# Altium PCB ecg-go_power.PcbDoc
Units mm, origin at the board's own origin, x right, y up, seen from the top; angles counter-clockwise.
Board outline 37 x 40 mm, 2 copper layers (Top Layer, Bottom Layer), stack 1.634 mm thick; 20 components, 14 nets, 74 pads, 37 vias.
Unrouted connection lines stored in the file: 1.
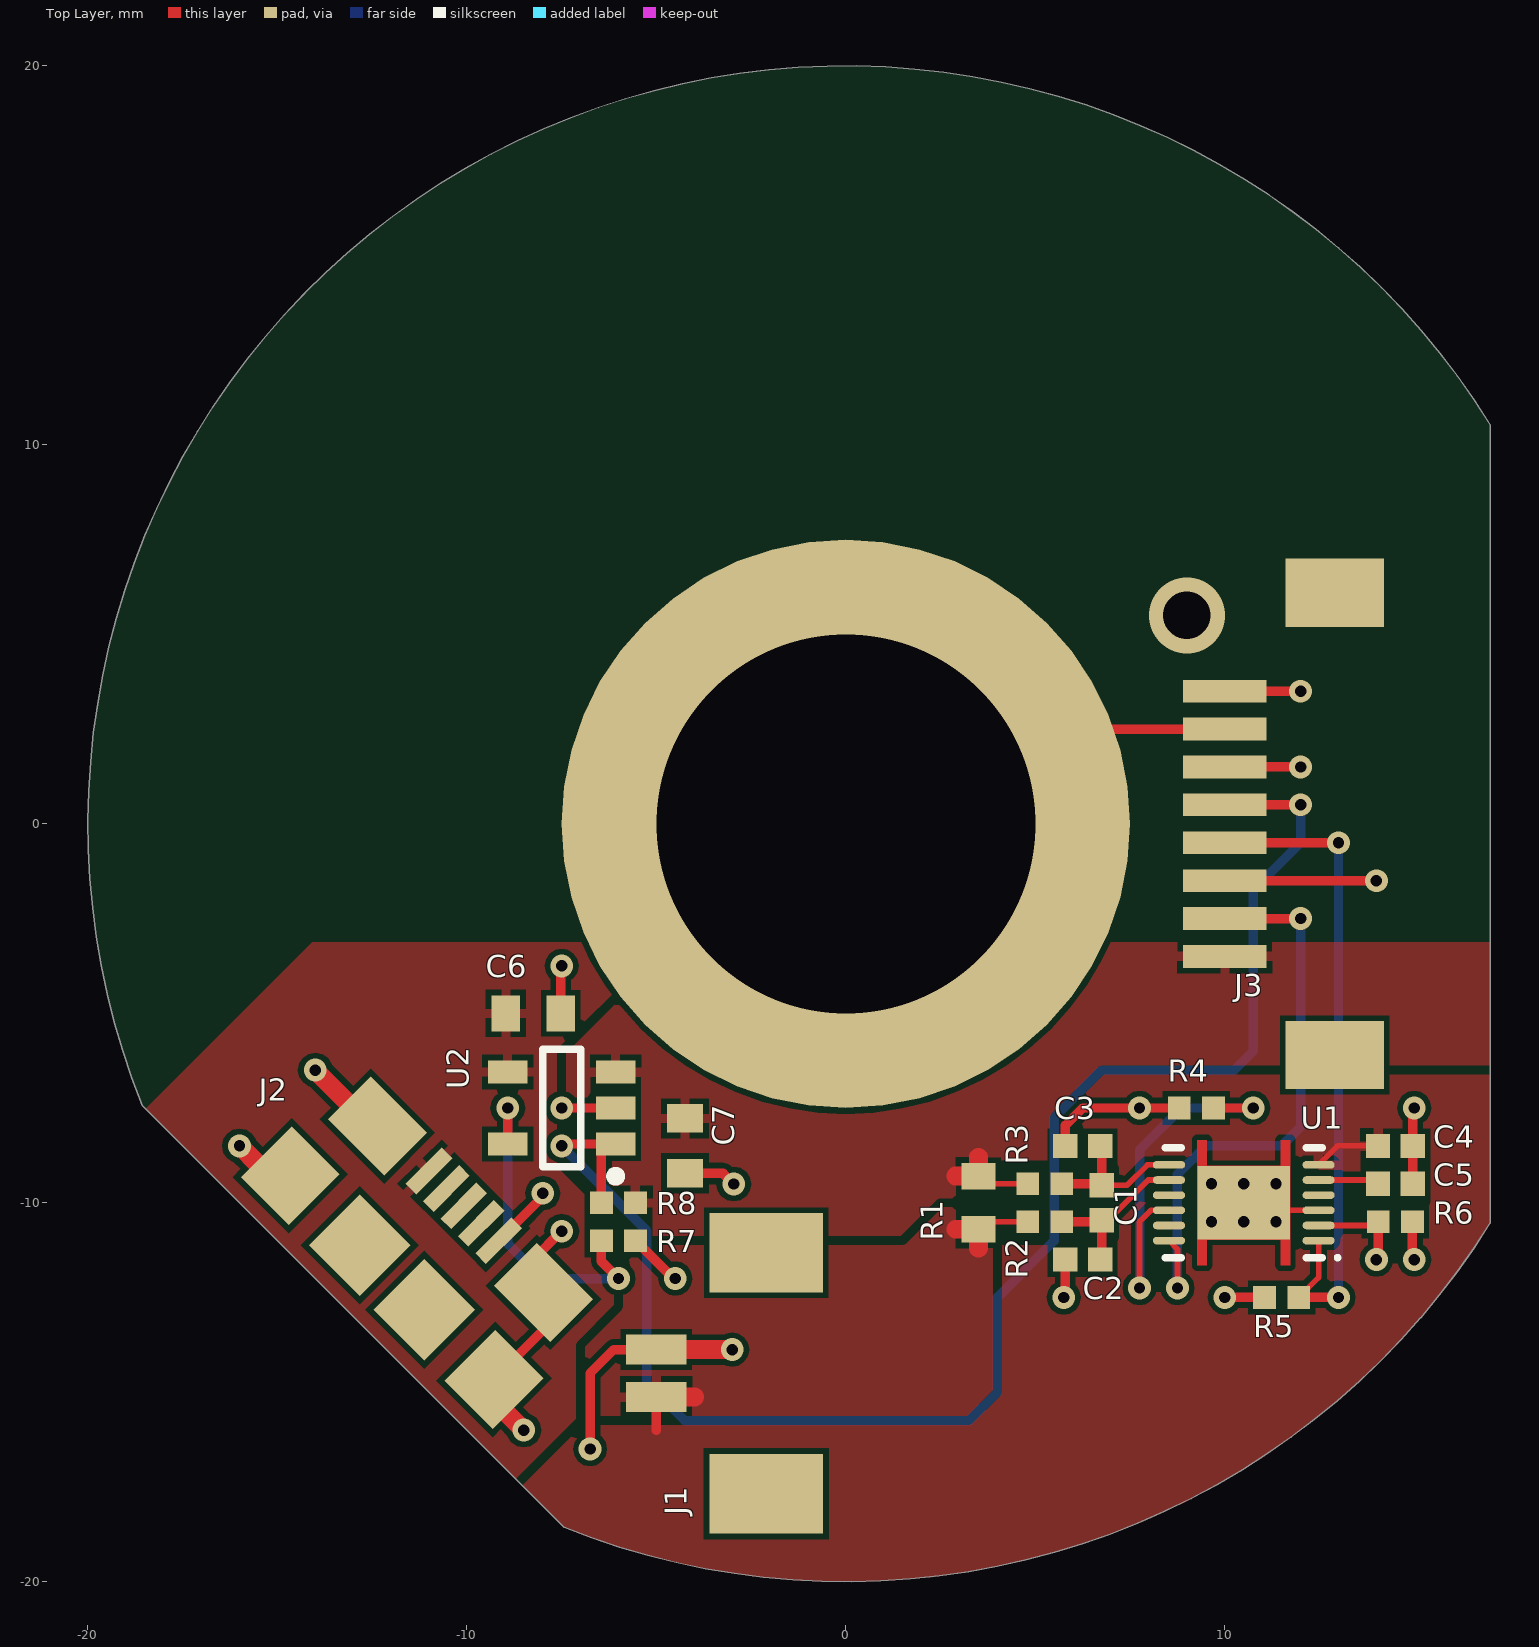
[diagram p0: Top Layer view]
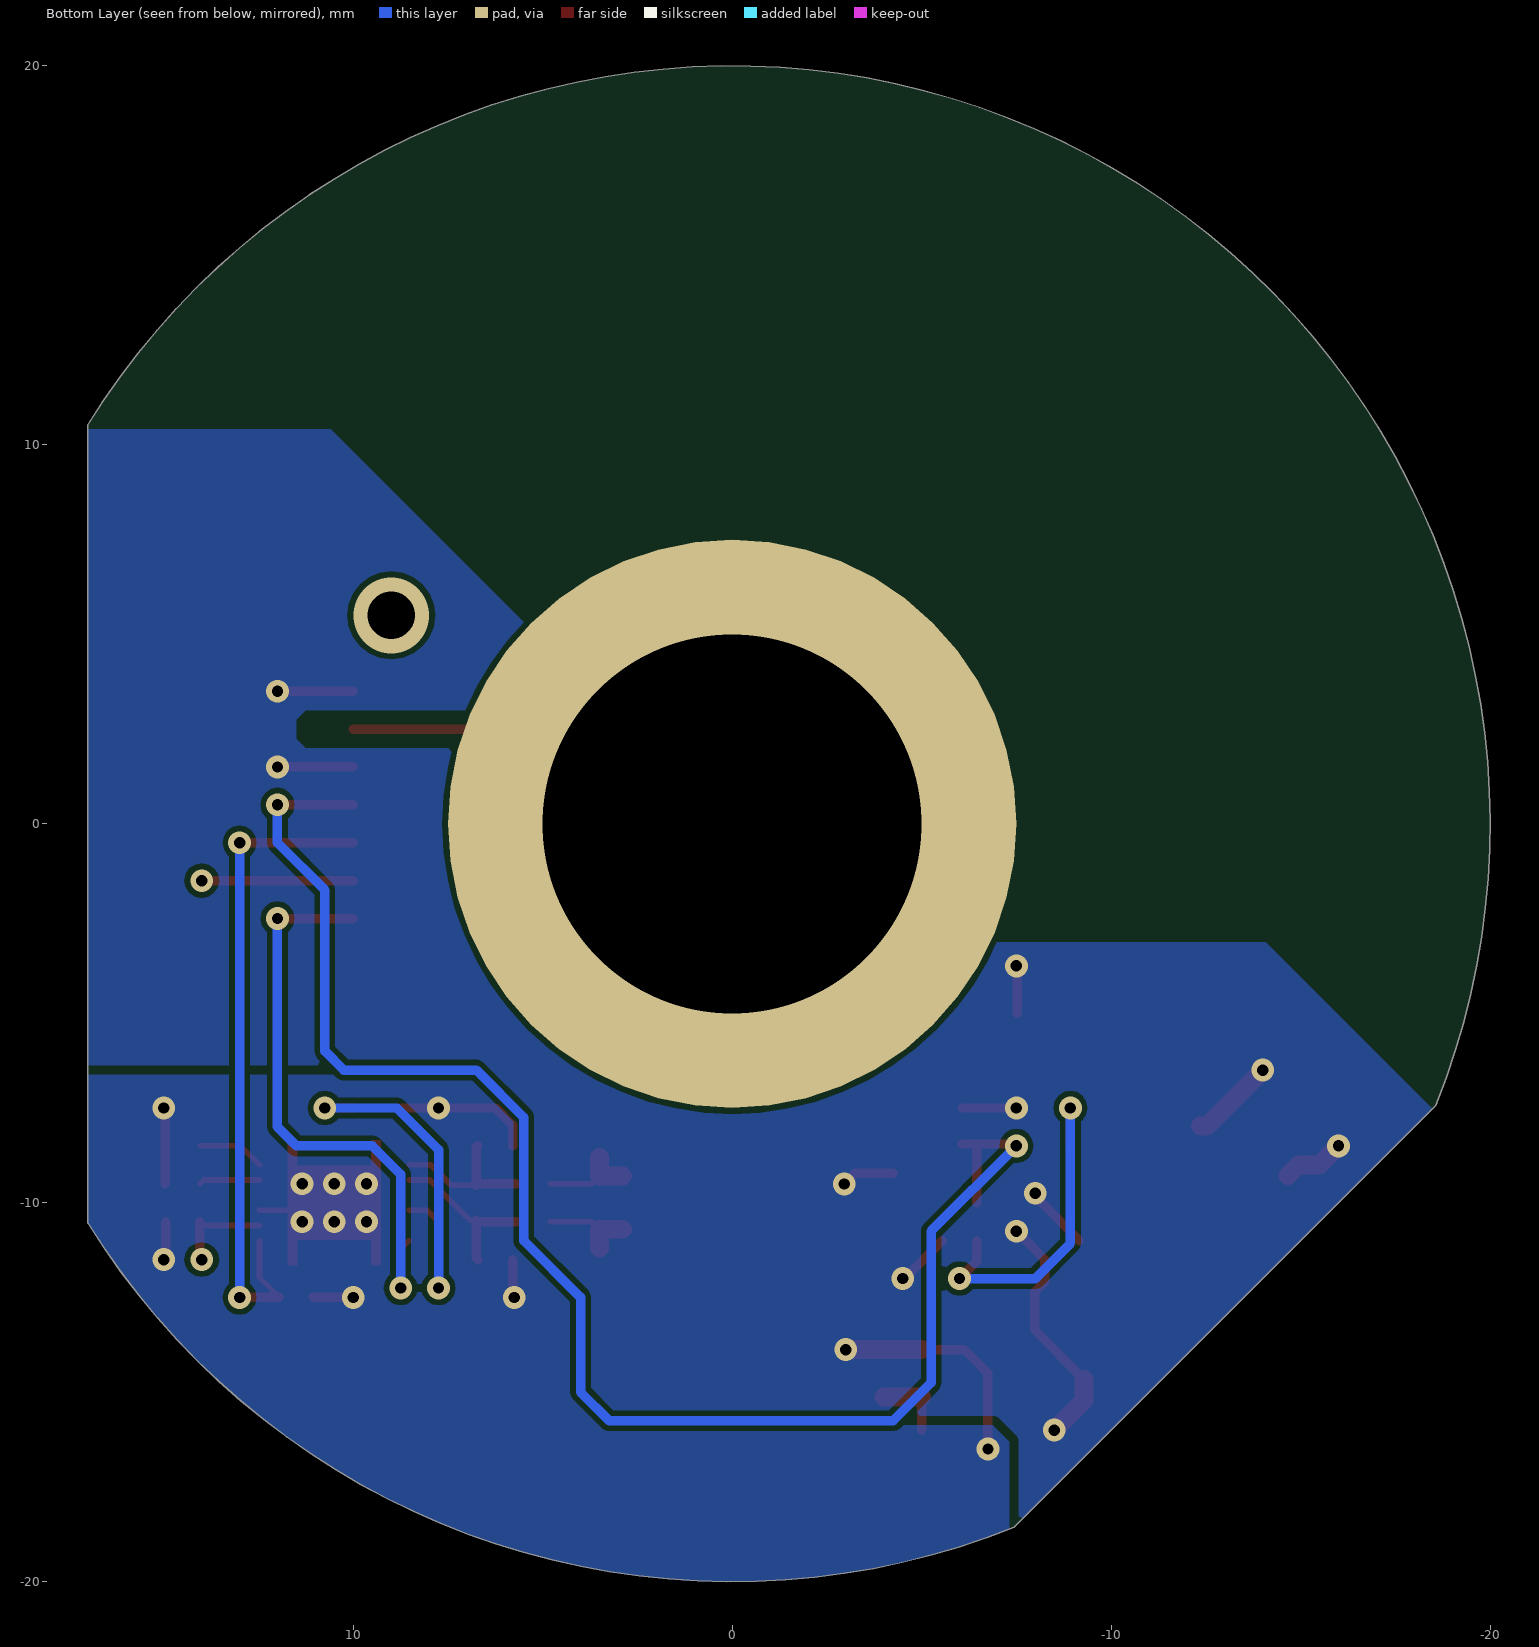
[diagram p1: Bottom Layer view, seen from below]
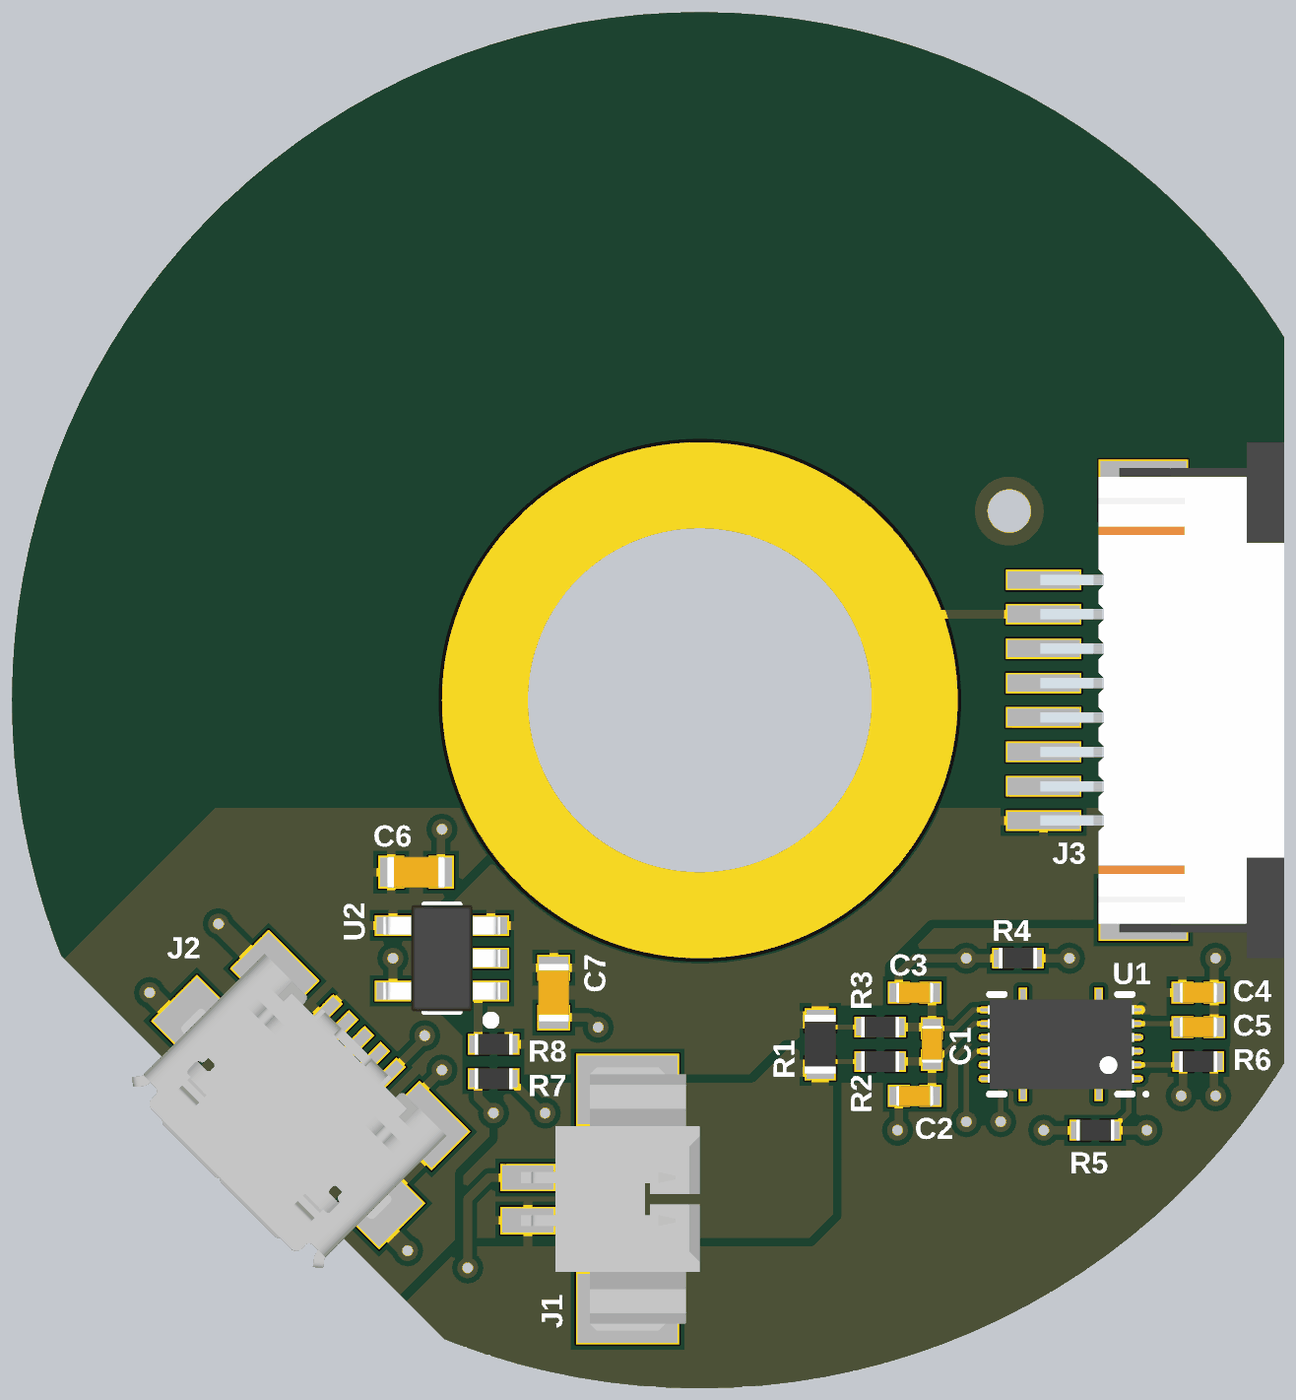
[diagram p2: 3D render of the assembled board from above, using the file's embedded part models]

## Layer stack, top to bottom
Top Solder: solder mask 0.0175, Solder Resist, Dk 3.5
Top Layer: signal copper 0.036
Dielectric 1: dielectric 1.562, FR-4, Dk 4.8
Bottom Layer: signal copper 0.036
Bottom Solder: solder mask 0.0175, Solder Resist, Dk 3.5

## Board outline
-18.568,-7.432 -7.432,-18.568 ccw(c0,0) 17,-10.536 17,10.536 ccw(c0,0)

## Design rules (kind name [scope] priority, off if disabled: settings)
Clearance [All] p1: gap=0.15
ComponentClearance [All] p1: gap=0.25 collisioncheckmode=3 verticalgap=0.25 showdistances=TRUE
HoleSize [All] p1: absolutevalues=TRUE maxlimit=6.3 minlimit=0.3 maxpercent=80.000 minpercent=20.000
MinimumSolderMaskSliver [All] p1: minsoldermaskwidth=0.25
PolygonConnect PolygonConnectVias [IsVia] p1: connectstyle=Direct reliefconductorwidth=0.254 reliefentries=4 polygonreliefangle="90 Angle" airgapwidth=0.254
PolygonConnect [All] p2: connectstyle=Relief reliefconductorwidth=0.25 reliefentries=4 polygonreliefangle="90 Angle" airgapwidth=0.15
RoutingVias [All] p1: holewidth=0.3 width=0.6 viastyle="Through Hole" minholewidth=0.3 minwidth=0.6 maxholewidth=6.3 maxwidth=10.6
SilkToSilkClearance [All] p1: silktosilkclearance=0.25
SilkToSolderMaskClearance [IsPad] p1: minsilkscreentomaskgap=0.25 clearancetoexposedcopper=TRUE
SolderMaskExpansion [All] p1: expansion=0.1
Width [All] p1: maxlimit=10 minlimit=0.15 preferedwidth=0.25
25 further rules are at their usual default settings.

## Components (designator, comment, footprint, x,y, rotation, side; value= is the part's Value field where it differs from the comment)
C1 "0.1u" C0402 6.75,-10 r270 top
C2 "10n" C0402 6.25,-11.5 r0 top
C3 "10n" C0402 6.25,-8.5 r180 top
C4 "1u" C0402 14.5,-8.5 r180 top
C5 "0.47u" C0402 14.5,-9.5 r180 top
C6 "10u" C0603 -8.25,-5 r180 top
C7 "10u" C0603 -4.25,-8.5 r90 top
J1 "Molex PicoBlade" "Molex 53261-0271" 0,-14.5 r90 top
J2 "USB Micro B" "Amphenol FCI 10118192-0001LF" -13,-13 r315 top
J3 "FFC Conn" WE68610814122 17,0 r90 top
R1 "0.01" R0603 3.5,-10 r90 top
R2 "100" R0402 5.25,-10.5 r0 top
R3 "100" R0402 5.25,-9.5 r0 top
R4 "1M" R0402 9.25,-7.5 r0 top
R5 "10M" R0402 11.5,-12.5 r0 top
R6 "10M" R0402 14.5,-10.5 r180 top
R7 "2.2k" R0402 -6,-11 r0 top
R8 "10M" R0402 -6,-10 r0 top
U1 "BQ27441DRZR-G1A" BQ27441DRZX-G1A 10.5,-10 r180 top
U2 "MCP73832" MCP7383X -7.5,-7.5 r180 top

## Footprints (in the part's own frame and the unit in brackets; to place one, negate y for a bottom-side part, rotate by r counter-clockwise, add the part's x,y. Pads: shape width x height; smd on the part's side, far side on the other; paste and mask are expansions set on the pad)
"Amphenol FCI 10118192-0001LF" [mm] "Conn - USB Micro B, SMD, Receptacle"
  rect 0.4x1.35 smd paste-0.05 mask+0.05: 1(-1.3,4.125) 2(-0.65,4.125) 3(0,4.125) 4(0.65,4.125) 5(1.3,4.125)
  rect 1.8x1.9 smd paste-0.05 mask+0.05: SHD(-3.8,1.45) SHD(3.8,1.45)
  rect 2.1x1.6 smd paste-0.05 mask+0.05: SHD(-3.1,4) SHD(3.1,4)
  rect 1.9x1.9 smd paste-0.05 mask+0.05: ""(-1.2,1.45) ""(1.2,1.45)
  body extent -3.96,-1.38 3.96,4.28, height 2.76
BQ27441DRZX-G1A [mm] "SON, 12-Leads, Body 4x2.5mm, Pitch 0.4mm, Thermal Pad 1.95x2.45mm, TI Recommended"
  oval 0.85x0.2 smd paste-0.05 mask+0.05: 1(-1.975,1) 2(-1.975,0.6) 3(-1.975,0.2) 4(-1.975,-0.2) 5(-1.975,-0.6) 6(-1.975,-1) 7(1.975,-1) 8(1.975,-0.6) 9(1.975,-0.2) 10(1.975,0.2) 11(1.975,0.6) 12(1.975,1)
  rect 2.45x1.95 smd paste-2.45 mask+0.05: 13(0,0)
  Top Layer region: -1.225,-1.65 -1.225,1.65 -0.975,1.65 -0.975,0.975 0.975,0.975 0.975,1.65 1.225,1.65 1.225,-1.65 0.975,-1.65 0.975,-0.975 -0.975,-0.975 -0.975,-1.65
  silkscreen extent -2.52,-1.45 2.07,1.5, body extent -2.12,-1.3 2.12,1.3, height 1
C0402 [mm] "Chip Capacitor, 2-Leads, Body 1,00x0,50mm, IPC Medium Density"
  rect 0.64x0.64 smd paste-0.05 mask+0.05: 1(-0.46,0) 2(0.46,0)
  body extent -0.55,-0.3 0.55,0.3, height 0.4
C0603 [mm] "Chip Capacitor, 2-Leads, Body 1,60x0,80mm, IPC Medium Density"
  rect 0.75x0.95 smd paste-0.05 mask+0.05: 1(-0.725,0) 2(0.725,0)
  body extent -0.85,-0.45 0.85,0.45, height 0.5
MCP7383X [mm] "SOT23, 5-Leads, Body 2,90x2,70mm, Pitch 0,95mm, IPC Medium Density"
  rect 1.05x0.6 smd paste-0.05 mask+0.05: 1(-1.425,0.95) 2(-1.425,0) 3(-1.425,-0.95) 4(1.425,-0.95) 5(1.425,0.95)
  silkscreen extent -1.55,-1.55 0.5,1.92, body extent -1.7,-1.55 1.7,1.55, height 1.45
"Molex 53261-0271" [mm] "Conn - Battery, PicoBlade, Male, 2 Pin, SMD, Right Angle"
  rect 0.8x1.6 smd paste-0.05 mask+0.05: 1(-0.625,5) 2(0.625,5)
  rect 2.1x3 smd paste-0.05 mask+0.05: ""(-3.175,2.1) ""(3.175,2.1)
  body extent -3.83,0 3.83,5.2, height 3.41
R0402 [mm] "Chip Resistor, 2-Leads, Body 1,00x0,50mm, IPC Medium Density"
  rect 0.6x0.6 smd paste-0.05 mask+0.05: 1(-0.45,0) 2(0.45,0)
  body extent -0.55,-0.3 0.55,0.3, height 0.4
R0603 [mm] "Chip Resistor, 2-Leads, Body 1,60x0,80mm, IPC Medium Density"
  rect 0.7x0.9 smd paste-0.05 mask+0.05: 1(-0.7,0) 2(0.7,0)
  body extent -0.85,-0.45 0.85,0.45, height 0.5
WE68610814122 [mm] "Conn - FFC, 8 Pin, 1 mm Pitch, Bottom Contacts, SMD, Right Angle, Slide Lock"
  rect 0.6x2.2 smd paste-0.05 mask+0.05: 1(-3.5,7) 2(-2.5,7) 3(-1.5,7) 4(-0.5,7) 5(0.5,7) 6(1.5,7) 7(2.5,7) 8(3.5,7)
  rect 1.8x2.6 smd paste-0.05 mask+0.05: ""(-6.1,4.1) ""(6.1,4.1)
  body extent -7.5,0 7.5,7.1, height 3.01

## Part data
C1 C2 C3 C4 C5 C6 C7: library part Capacitor, "Capacitor"
J1: library part "Molex 53261-0271", "Conn - Battery, PicoBlade, Male, 2 Pin, SMD, Right Angle"
J2: library part "Amphenol FCI 10118192-0001LF", "Conn - USB Micro B, SMD, Receptacle"
J3: library part WE68610814122, "Conn - FFC, 8 Pin, 1 mm Pitch, Top Contacts, SMD, Right Angle, Slide Lock"
R1 R2 R3 R4 R5 R6 R7 R8: library part Resistor, "Resistor"
U1: "IC - Fuel Gauge, System-Side Impedance Track"
U2: "IC - Battery Charger, Single Cell Li-Ion/LiPo, 0.5A"

## Free pads (board coordinates)
  round 15 hole 10: ""(0,0)

## Via types
v1: diameter 0.6, hole 0.3, Top Layer to Bottom Layer, tented both sides, 36 vias
v2: diameter 2, hole 1.25, Top Layer to Bottom Layer, 1 vias

## Nets (pads, with @x,y where several pads share a name; then routed paths per layer and width w, separated by ;. In a path a pad name is that pad's centre, name@x,y a point inside that pad or via, vN(x,y) a via of type N, cw(c..) or ccw(c..) an arc to the next point about the centre after c; other vN are vias at no path point)
FGND: C2.1 C3.2 C4.1 C5.1 C6.1 C7.1 J1.2 J2.5 J2.SHD J3.6 J3.8 R4.1 R5.1 R6.1 R7.2 U1.3 U1.13 U2.2 | length 37.7
  Top Layer w0.15: v1(11.35,-10.5) 11.65,-10.2 U1.3
  Top Layer w0.25: J2.SHD@-9.288,-14.662 -7.98,-13.354 -7.98,-12.364 -8.25,-12.093 -8.25,-11.5 v1(-7.5,-10.75) ; J2.5 -8,-9.838 v1(-8,-9.75) ; C6.1 -7.525,-3.775 v1(-7.5,-3.75) ; v1(-7.5,-7.5) U2.2 ; v1(-6.75,-16.5) -6.75,-14.5 -6.125,-13.875 J1.2 ; R7.2 -4.55,-12 v1(-4.5,-12) ; C7.1 -3.238,-9.225 v1(-2.958,-9.505) ; v1(5.75,-12.5) 5.79,-12.46 C2.1 ; C3.2 5.79,-7.96 6.25,-7.5 v1(7.75,-7.5) R4.1 ; v1(10,-12.5) R5.1 ; J3.6 v1(12,1.5) ; J3.8 v1(12,3.5) ; v1@14.95,-11.45 R6.1 ; C5.1 C4.1 v1@14.96,-7.54
  Top Layer w0.5: v1(-16,-8.5) -15.5,-9 -14.949,-9 J2.SHD@-14.662,-9.288 ; v1(-14,-6.5) -12.521,-7.979 J2.SHD@-12.364,-7.979 ; J2.SHD@-9.288,-14.662 -9.288,-15.212 v1(-8.5,-16) ; J1.2 v1(-3,-13.875)
  other v1: 15,-11.5 9.65,-10.5 10.5,-10.5 9.65,-9.5 10.5,-9.5 11.35,-9.5 15,-7.5
NetC5_2: C5.2 U1.5 | length 1.6
  Top Layer w0.15: U1.5 13.94,-9.4 C5.2
NetR7_1: R7.1 U2.5 | length 8.9
  Top Layer w0.25: U2.5 v1@-8.925,-7.575 ; R7.1 -6.45,-11.55 v1(-6,-12)
  Bottom Layer w0.25: v1(-8.925,-7.5) -8.925,-11.075 -8,-12 v1(-6,-12)
PWR_CHRG_STAT: J3.5 R8.1 U2.1 | length 43
  Top Layer w0.25: v1(-7.5,-8.5) -7.45,-8.45 U2.1@-6.45,-8.45 ; R8.1 U2.1@-6.45,-8.45 ; U2.1 U2.1@-6.45,-8.45 ; J3.5 v1(12,0.5)
  Bottom Layer w0.25: v1(-7.5,-8.5) -5.25,-10.75 -5.25,-14.75 -4.25,-15.75 3.25,-15.75 4,-15 4,-12.5 5.5,-11 5.5,-7.75 6.75,-6.5 10.25,-6.5 10.75,-6 10.75,-1.75 12,-0.5 v1(12,0.5)
PWR_CHRG_VIN: C6.2 J2.1 U2.4
PWR_ELEC_RA: J3.7 pad. | length 11
  Top Layer w0.25: pad. 2.5,2.5 J3.7
PWR_FG_BIN: R4.2 U1.10 | length 10.6
  Top Layer w0.15: v1(7.75,-12.25) 7.75,-10.5 8.05,-10.2 U1.10
  Top Layer w0.25: R4.2@9.95,-7.5 v1(10.75,-7.5)
  Bottom Layer w0.25: v1(7.75,-12.25) 7.75,-8.603 8.853,-7.5 v1(10.75,-7.5)
PWR_FG_GPOUT: J3.2 U1.12 | length 15.6
  Top Layer w0.15: U1.12 8.75,-11.225 v1(8.75,-12.25)
  Top Layer w0.25: J3.2 v1(12,-2.5)
  Bottom Layer w0.25: v1(8.75,-12.25) 8.75,-9.25 9.5,-8.5 11.5,-8.5 12,-8 v1(12,-2.5)
PWR_FG_SCL: J3.3 R6.2 U1.2 | length 6.7
  Top Layer w0.15: U1.2 13.95,-10.6 R6.2
  Top Layer w0.25: J3.3 v1(14,-1.5) ; v1@14.05,-11.5 R6.2
  Bottom Layer w0.25: v1@13.959,-11.541 v1(14,-11.5)
PWR_FG_SDA: J3.4 R5.2 U1.1 | length 17.8
  Top Layer w0.15: R5.2 12.475,-11.975 U1.1
  Top Layer w0.25: J3.4 v1(13,-0.5) ; R5.2 v1(13,-12.5)
  Bottom Layer w0.25: v1(13,-12.5) v1(13,-0.5)
PWR_FG_SR_N: C1.1 C3.1 R3.2 U1.7 | length 4.1
  Top Layer w0.15: C1.1 7.416,-9.54 7.956,-9 U1.7
  Top Layer w0.25: R3.2 C1.1@6.71,-9.5 ; C3.1 6.75,-8.54 C1.1
PWR_FG_SR_P: C1.2 C2.2 R2.2 U1.8 | length 4.3
  Top Layer w0.15: C1.2 6.92,-10.46 7.98,-9.4 U1.8
  Top Layer w0.25: R2.2 6.71,-10.5 C1.2 6.75,-11.46 C2.2
PWR_PACK: C4.2 J1.1 R1.1 R2.1 U1.6 | length 6.1
  Top Layer w0.15: R1.1 3.7,-10.5 R2.1 ; U1.6 12.975,-8.5 C4.2
  Top Layer w0.25: -5,-16 J1.1
  Top Layer w0.5: J1.1 -4,-15.125 ; 2.9,-10.7 R1.1 3.5,-11.2
PWR_VSYS: C7.2 J3.1 R1.2 R3.1 R8.2 U2.3 | length 2.5
  Top Layer w0.15: R1.2 3.7,-9.5 R3.1
  Top Layer w0.5: 2.9,-9.3 R1.2 3.5,-8.8
pads on no net: J1. J2. J2.2 J2.3 J2.4 J3. U1.4 U1.9 U1.11
copper on no net:
  other v2: 9,5.5

## Polygon pours and split planes (outlines as drawn)
FGND on Bottom Layer "BOT_GND_FG" (solid, pour order 109): 4.125,-15 4.125,-12.552 5.588,-11.089 5.588,-11.088 5.625,-11 5.625,-7.802 6.802,-6.625 17,-6.625 17,-10.536 cw(c0,0) -7.307,-18.617 -7.307,-16.302 -6.88,-15.875 3.25,-15.875 3.338,-15.838 3.339,-15.838 4.088,-15.089 4.088,-15.088
FGND on Bottom Layer "BOT_GND" (solid, pour order 108): 3.875,-14.948 3.875,-12.5 3.911,-12.412 3.912,-12.412 3.912,-12.411 5.375,-10.948 5.375,-7.75 5.411,-7.662 5.412,-7.662 5.412,-7.661 6.661,-6.412 6.662,-6.412 6.662,-6.411 6.75,-6.375 17,-6.375 17,10.411 10.587,10.411 -2.911,-3.088 -3,-3.125 -14.084,-3.125 -18.479,-7.521 -7.557,-18.443 -7.557,-16.25 -7.521,-16.162 -7.021,-15.662 -6.932,-15.625 3.198,-15.625
PWR_PACK on Top Layer "TOP_PWR_PACK_FG" (solid, pour order 111): -8.537,-17.463 -6.948,-15.875 3.25,-15.875 3.338,-15.838 3.339,-15.838 4.088,-15.089 4.088,-15.088 4.125,-15 4.125,-11.125 5.5,-11.125 5.625,-11 5.625,-7.802 6.802,-6.625 17,-6.625 17,-10.536 cw(c0,0) -7.432,-18.568
PWR_PACK on Top Layer "TOP_PWR_PACK" (solid, pour order 112): -6.875,-15.625 -6.875,-13.802 -5.912,-12.839 -5.912,-12.838 -5.875,-12.75 -5.875,-11.552 -5.448,-11.125 1.5,-11.125 1.588,-11.088 1.589,-11.088 2.552,-10.125 3.375,-10.125 3.375,-11 3.5,-11.125 3.875,-11.125 3.875,-14.948 3.198,-15.625
PWR_VSYS on Top Layer "TOP_PWR_VSYS" (solid, pour order 113): 2.5,-9.875 3.875,-9.875 3.875,-9 4,-8.875 5.375,-8.875 5.375,-7.75 5.411,-7.662 6.661,-6.412 6.75,-6.375 17,-6.375 17,-3.125 -4.448,-3.125 -7.375,-6.052 -7.375,-8.948 -5.448,-10.875 1.448,-10.875 2.411,-9.912
PWR_CHRG_VIN on Top Layer "TOP_PWR_CHRG_VIN" (solid, pour order 110): -7.625,-6 -7.589,-5.912 -7.588,-5.912 -7.588,-5.911 -4.802,-3.125 -14.084,-3.125 -18.479,-7.521 -8.713,-17.287 -7.125,-15.698 -7.125,-13.75 -7.089,-13.662 -7.088,-13.662 -7.088,-13.661 -6.125,-12.698 -6.125,-11.5 -6.089,-11.412 -6.088,-11.412 -6.088,-11.411 -5.677,-11 -7.588,-9.089 -7.588,-9.088 -7.589,-9.088 -7.625,-9

## Other copper
Bottom Layer:
  pour cut-out: 11.25,2 6.75,2 6.75,3 11.25,3 11.5,2.75 11.5,2.25

## Silkscreen, mask and mechanical layers (free items; w line width, h text height)
Mechanical 1:
  the board outline again, w0.25